# Altium PCB PCB1.PcbDoc
Units mil, origin at the board's own origin, x right, y up, seen from the top; angles counter-clockwise.
Board outline 1600 x 1365 mil, 2 copper layers (Top Layer, Bottom Layer); 12 components, 8 nets, 36 pads, 6 vias.
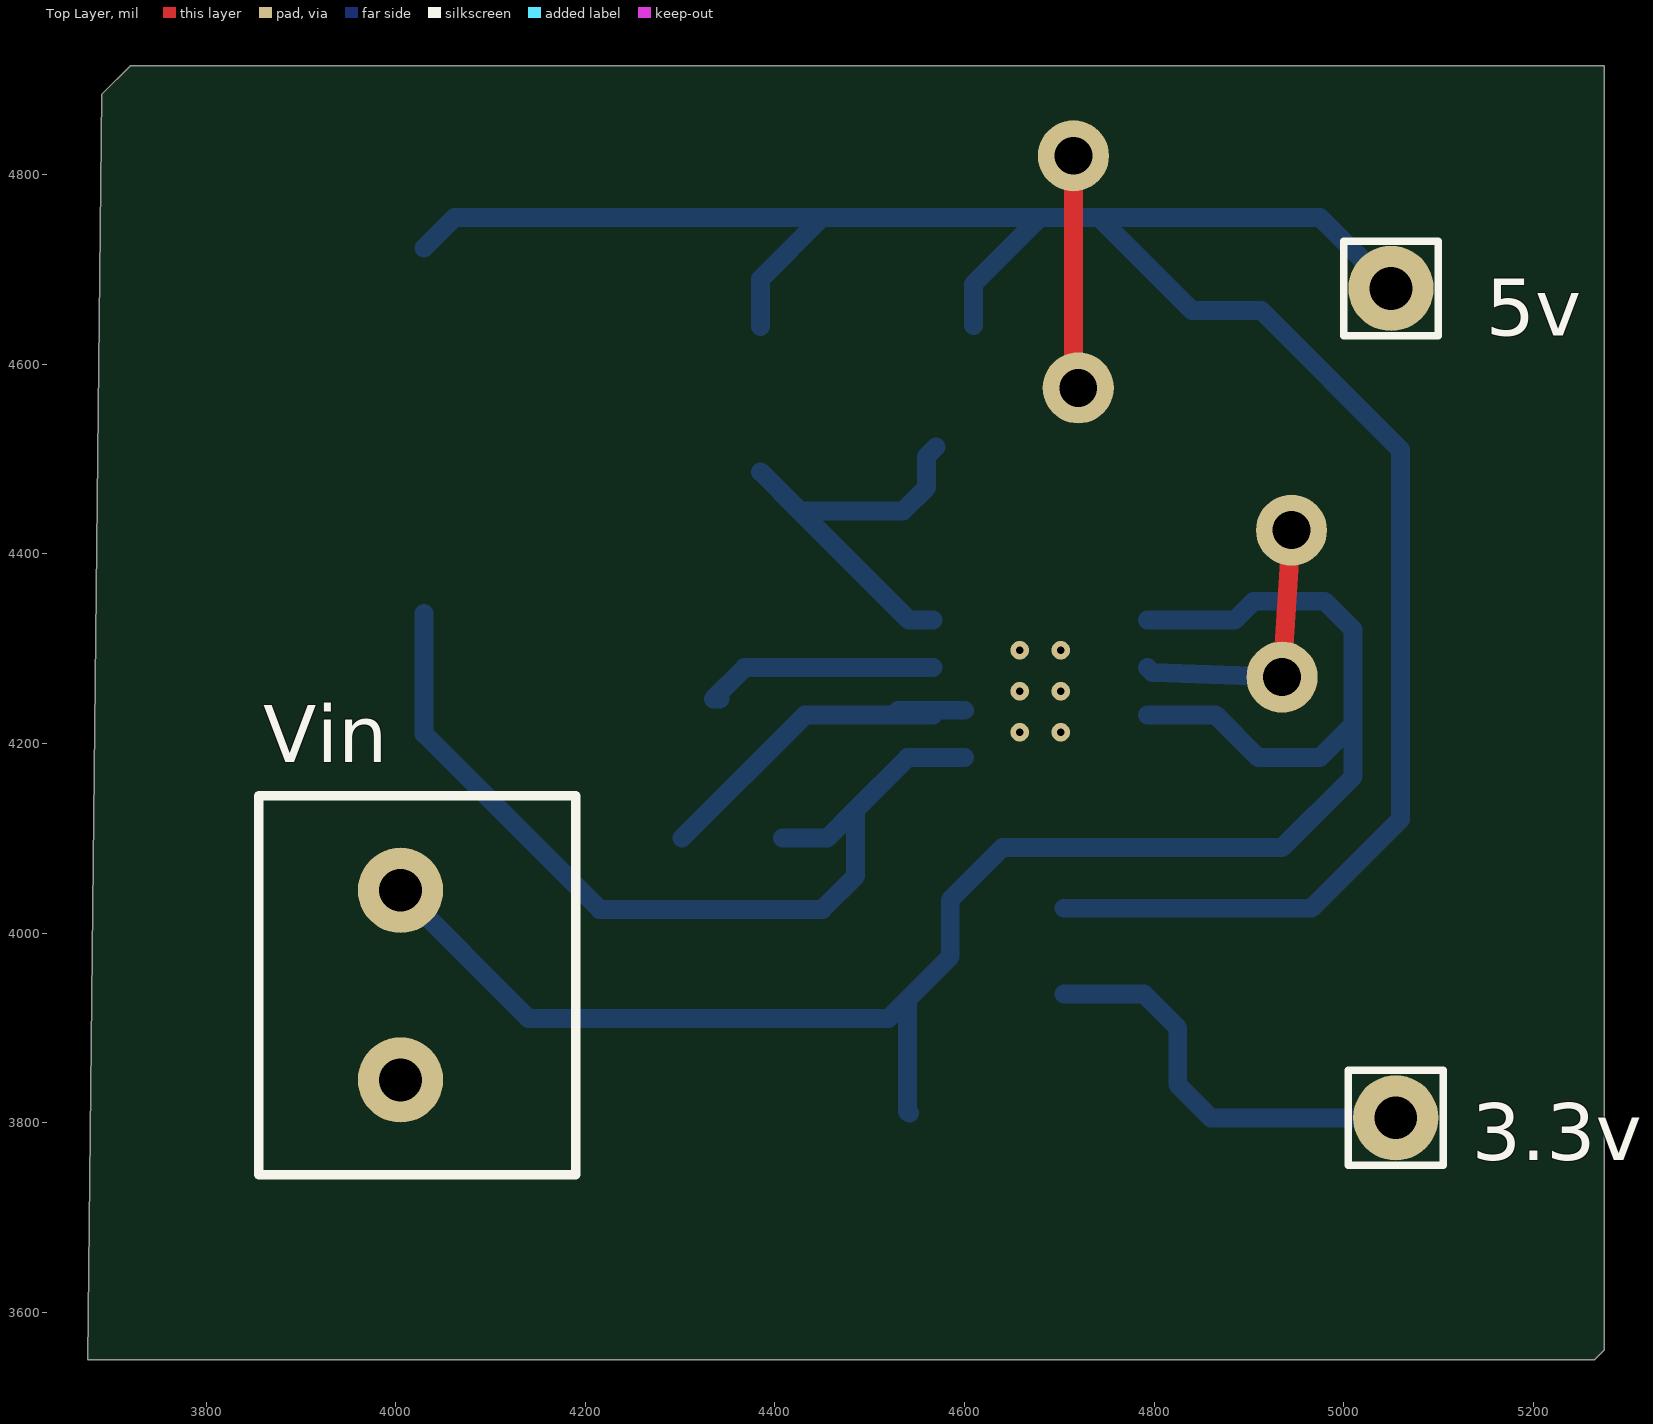
[diagram p0: Top Layer view]
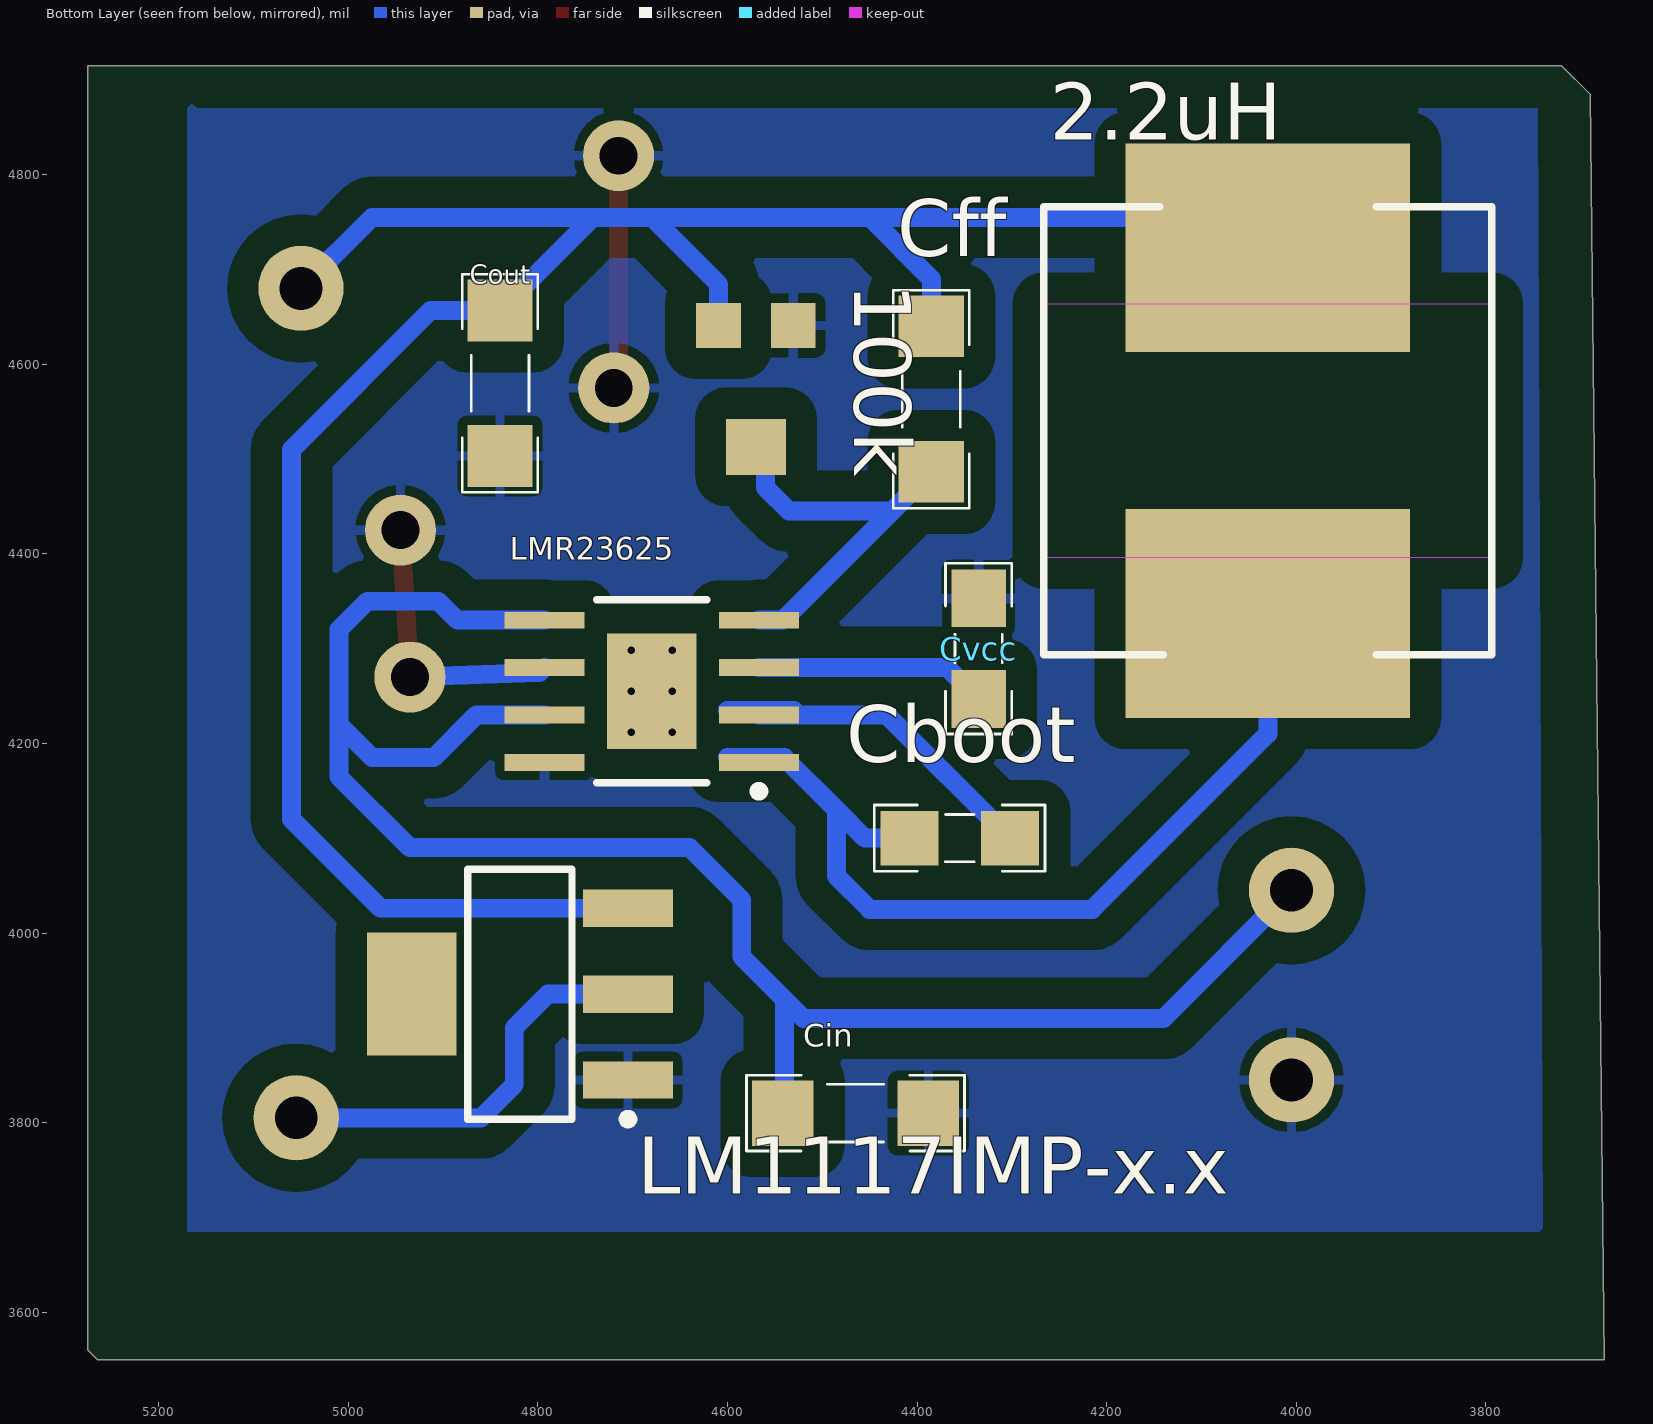
[diagram p1: Bottom Layer view, seen from below]
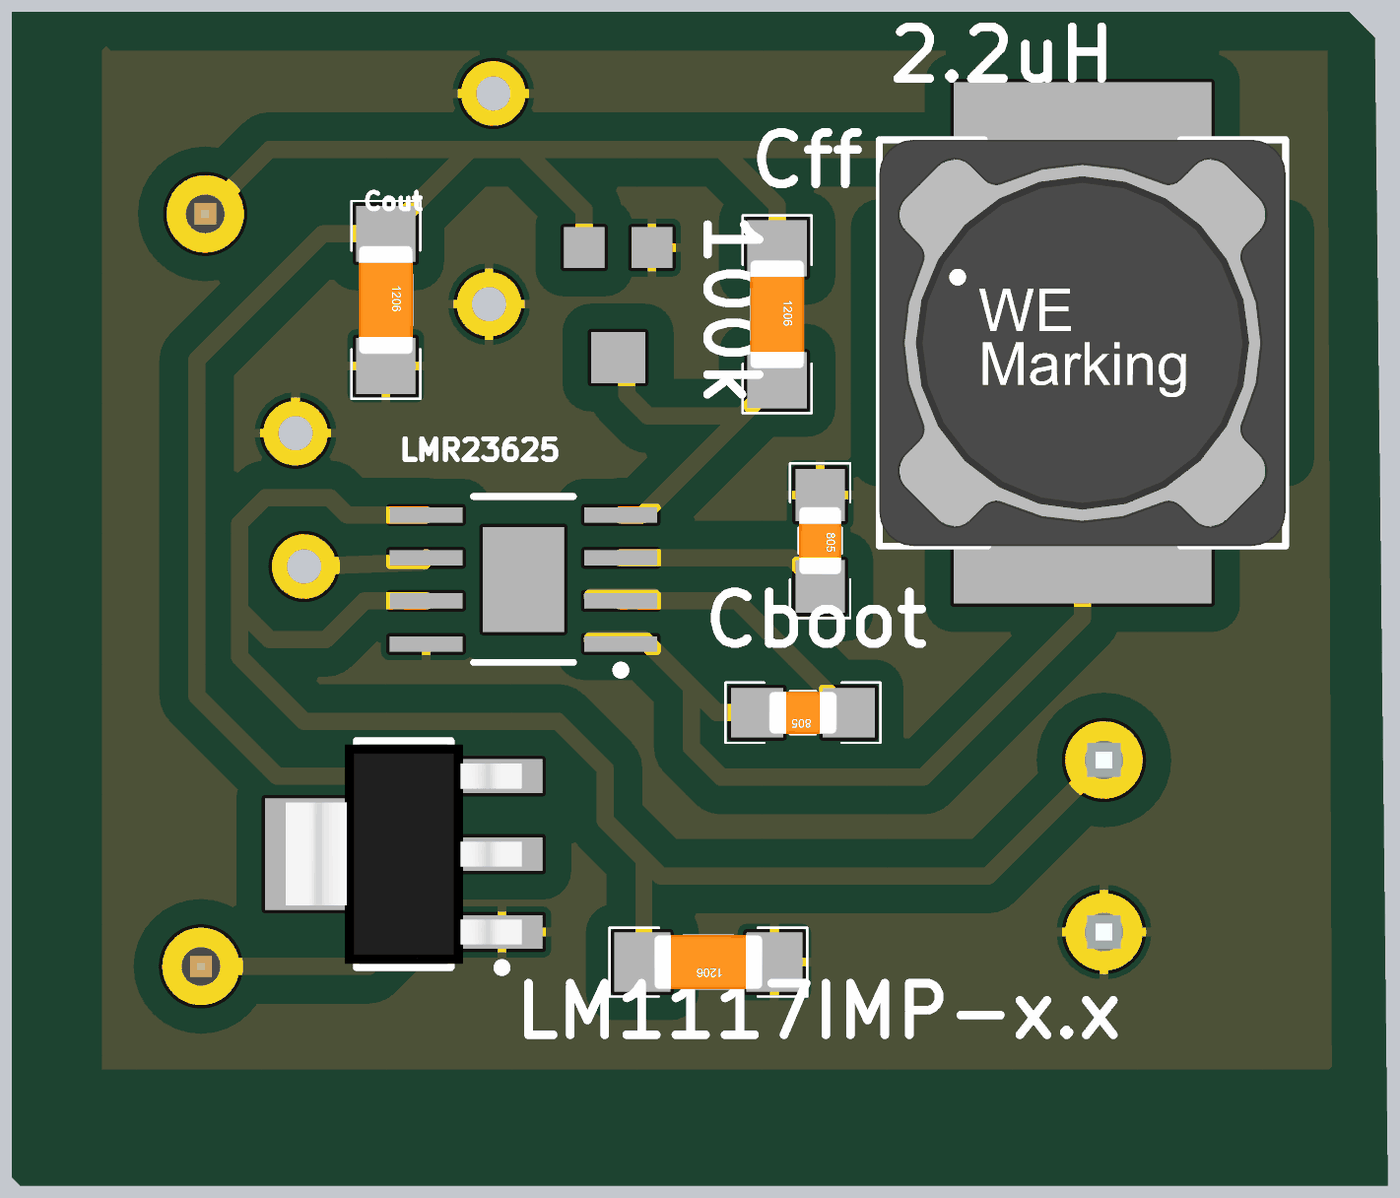
[diagram p2: 3D render of the assembled board from below, using the file's embedded part models]

## Layer stack, top to bottom
Top Solder: solder mask 0.4, Solder Resist, Dk 3.5
Top Layer: signal copper 1.4
Dielectric 1: dielectric 12.6, FR-4, Dk 4.8
Bottom Layer: signal copper 1.4
Bottom Solder: solder mask 0.4, Solder Resist, Dk 3.5

## Board outline
3690,4885 3720,4915 5275,4915 5275,3560 5265,3550 3675,3550

## Design rules (kind name [scope] priority, off if disabled: settings)
Clearance [All] p1: gap=33 ignorepadtopadclearanceinfootprint=FALSE except(0: Arc-Hole Track-Hole SMDPad-Hole THPad-Hole Via-Hole Fill-Hole Poly-Hole Region-Hole Text-Hole; 8: Arc-SMDPad Track-SMDPad SMDPad-SMDPad; 10: Arc-Arc Arc-Track Arc-THPad Arc-Via Arc-Text Track-Track Track-THPad Track-Via Track-Text SMDPad-THPad SMDPad-Via SMDPad-Text THPad-THPad THPad-Via THPad-Text Via-Via Via-Text Fill-Text Poly-Text Region-Text Text-Text)
PolygonConnect [All] p1: connectstyle=Relief reliefconductorwidth=10 reliefentries=4 polygonreliefangle="90 Angle" airgapwidth=10
RoutingVias [All] p1: holewidth=28 width=50 viastyle="Through Hole" minholewidth=28 minwidth=50 maxholewidth=28 maxwidth=50
SolderMaskExpansion [All] p1: expansion=4
Width [All] p1: maxlimit=24 minlimit=16 preferedwidth=20
30 further rules are at their usual default settings.

## Components (designator, comment, footprint, x,y, rotation, side; value= is the part's Value field where it differs from the comment)
2.2uH "1.0 μH" WE-PDA_1210 4030,4530 r180 bottom
3.3v "61300111121" 61300111121 5055,3805 r0 top
5v "61300111121" 61300111121 5050,4680 r0 top
100k "" TRIM_TC33X-2-104E 4570,4570 r270 bottom
Cboot "0.47uF" CAPC3413X12N 4355,4100 r0 bottom
Cff "18pF" CAPC4817X12N 4385,4563.23 r270 bottom
Cin "10uF" CAPC4817X12N 4465,3810 r0 bottom
Cout "33uF" CAPC4817X12N 4840,4580 r270 bottom
Cvcc "2.2uF" CAPC3413X12N 4335,4300 r270 bottom
LM1117IMP-x.x "LM1117IMP-x.x" SOT223_N 4819.17,3935.55 r0 bottom
LMR23625 "" LMR23625 4680,4255 r0 bottom
Vin "691311500002" 691311500002 4005,3945 r270 top

## Footprints (in the part's own frame and the unit in brackets; to place one, negate y for a bottom-side part, rotate by r counter-clockwise, add the part's x,y. Pads: shape width x height; smd on the part's side, far side on the other; paste and mask are expansions set on the pad)
61300111121 [mil] "1pins, 1 row, straight, gold plating"
  round 90 hole 45: 1(0,0)
  silkscreen extent -50,-50 50,50, body extent -50,-50 50,50, height 337
691311500002 [mil] "5,08mm - PCB Headers - Vertical - Opened ends -02p"
  round 90 hole 45: 1(-100,0) 2(100,0)
  silkscreen extent -200,-150 200,185, body extent -200,-150 200,185, height 473
CAPC3413X12N [mm] "Chip Capacitor, 2-Leads, Body 3/40x1/30mm, IPC Medium Density-Design:Abbas Basereh"
  rect 1.55x1.45 smd: 1(-1.35,0) 2(1.35,0)
  silkscreen extent -2.29,-0.89 2.29,0.89, body extent -1,-0.63 1,0.62, height 0.78
CAPC4817X12N [mm] "Chip Capacitor, 2-Leads, Body 4/80x1/70mm, IPC Medium Density-Design:Abbas Basereh"
  rect 1.65x1.75 smd: 1(-1.95,0) 2(1.95,0)
  silkscreen extent -2.92,-1.02 2.92,1.02, body extent -1.6,-0.8 1.6,0.8, height 1
LMR23625 [mm] "SOIC, 8-Leads, Body 4.90x3.90mm, Pitch 1.27mm, Thermal Pad 3.10x2.40mm, IPC Medium Density"
  rect 2.15x0.45 smd: 1(-2.875,1.905) 2(-2.875,0.635) 3(-2.875,-0.635) 4(-2.875,-1.905) 5(2.875,-1.905) 6(2.875,-0.635) 7(2.875,0.635) 8(2.875,1.905)
  rect 2.4x3.1 smd: 9(0,0)
  silkscreen extent -3,-2.45 1.47,2.8, body extent -2,-2.5 2,2.5, height 1.7
SOT223_N [mm] "SOT223, 4-Leads, Body 6.5x3.5mm, Pitch 2.3mm, Lead Span 7mm, IPC Medium Density"
  rect 2.4x1 smd: 1(-2.9,2.3) 2(-2.9,0) 3(-2.9,-2.3)
  rect 2.4x3.3 smd: 4(2.9,0)
  silkscreen extent -3.02,-3.35 1.4,3.47, body extent -3.49,-3.24 3.49,3.24, height 1.64
TRIM_TC33X-2-104E [mm]
  rect 1.2x1.2 smd: 1(-1.8,1) 3(-1.8,-1)
  rect 1.5x1.6 smd: 2(1.45,0)
WE-PDA_1210 [mil] "WE-PDA SMD Shielded Power Inductor, 1210"
  rect 300x220 smd: 1(0,192.91) 2(0,-192.91)
  Top Layer keep-out region: -236.22,133.86 236.22,133.86 236.22,-133.86 -236.22,-133.86
  silkscreen extent -236,-236 236,236, body extent -236,-236 236,236, height 382

## Part data
2.2uH: library part "WE-PDA 1210, 7847709010", "WE-PDA SMD Shielded Power InductorInductance = 1.0 µH", Inductance="1.0 µH", Manufacturer="Wurth Elektronik", partNo=7847709010, ComponentLink1Description=Manufacturer, ComponentLink1URL=http://www.we-online.de, ComponentLink2Description=Datasheet, ComponentLink2URL=http://katalog.we-online.de/pbs/datasheet/7847709010.pdf, Created by="Baojun Chen", Created Date=Nov.2015
3.3v 5v: "WR-PHD 2.54 mm THT Pin Header, 1p", Rated Current="3 A", Withstanding Voltage="500 VAC", Working Voltage="250 VAC", ComponentLink1Description=Manufacturer, ComponentLink1URL=http://www.we-online.de, ComponentLink2Description=Datasheet, ComponentLink2URL=http://katalog.we-online.de/em/datasheet/6130xx11121.pdf, Part Number=61300111121, Pin Number=1, Pitch="2.54 mm", Published Date="Aug 2017", Publisher="Wurth Elektronik"
100k: library part TC33X-2-104E, Package="SOD-23 Bourns", Availability=Unavailable, MF=Bourns, MP=TC33X-2-104E, Price=None
Cboot Cvcc: library part "CAP SMD 0805", "CAP 0805", Data=16-12-2016, Desc.="CAP SMD 0805", Designer="Abbas Basereh"
Cff Cin Cout: library part "CAP SMD 1206", "CAP 1206", Data=16-12-2016, Desc.="CAP SMD 1206", Designer="Abbas Basereh"
LM1117IMP-x.x: "x.x Volt, 800mA Low-Dropout Linear Regulator, 4-pin SOT-223", Manufacturer="National Semiconductor", PackageTopMarking=XYTT*N05B, PartNumber=LM1117IMP-3.3, PowerWise=N, Supplier Part Number 1=7614123, Code_IPC=SOT223-4, Code_JEDEC=TO-261-AA, ComponentLink1Description="LM1117 Datasheet", ComponentLink1URL=http://www.national.com/ds/LM/LM1117.pdf, ComponentLink2Description="LM1117 Web Page", ComponentLink2URL=http://www.national.com/pf/LM/LM1117.html, ComponentLink3Description="MP04A Package Page", ComponentLink3URL=http://www.national.com/packaging/folders/mp04a.html, CompType="LDO IC", DatasheetVersion=Apr-2006, PackageDescription="Molded SOT-223, 6.50 x 3.56 x 1.6mm Body, 4 Lead, 2.3mm Pitch", PackageReference=MP04A, PackageVersion="revB, Apr-2003", PinCount=4, Published=4-Dec-2008, Publisher="Altium Limited", RoHS=N, Supplier 1=Farnell
LMR23625: library part Component_1
Vin: "WR-TBL Serie 311 - 5.08 mm Open Vertical PCB Header, 02p", ComponentLink1Description=Manufacturer, ComponentLink1URL=http://www.we-online.de, ComponentLink2Description=Datasheet, ComponentLink2URL=http://katalog.we-online.de/em/datasheet/6913115000xx.pdf, Part Number=691311500002, Pin Number=02p, Pitch="5.08 mm", Published Date="Feb. 2017", Publisher="Wurth Elektronik"

## Free pads (board coordinates)
  round 75 hole 40: 2(4945,4425) 3(4935,4270) 4(4720,4575) 5(4715,4820)

## Via types
v1: diameter 19.68, hole 7.87, Top Layer to Bottom Layer, 6 vias

## Nets (pads, with @x,y where several pads share a name; then routed paths per layer and width w, separated by ;. In a path a pad name is that pad's centre, name@x,y a point inside that pad or via, vN(x,y) a via of type N, cw(c..) or ccw(c..) an arc to the next point about the centre after c; other vN are vias at no path point)
FB: 100k.2 Cff.2 LMR23625.4 | length 437.6
  Bottom Layer w20: Cff.2 4426.46,4445 ; LMR23625.4 4541.46,4330 4426.46,4445 ; 100k.2 4560,4502.91 4560,4470 4535,4445 4426.46,4445
GND: 100k.1 Cin.1 Cout.2 Cvcc.1 LM1117IMP-x.x.1 LMR23625.6 LMR23625.8 pad.2 pad.3 pad.4 pad.5 Vin.2 | length 546.4
  Top Layer w20: pad.5 4715,4580 pad.4 ; pad.3 pad.2
  Bottom Layer w20: LMR23625.6 4798.19,4275 pad.3
Net2.2uH_2: 2.2uH.2 Cboot.2 LMR23625.1 | length 970.3
  Bottom Layer w20: 2.2uH.2 4030,4210 4215,4025 4450,4025 4485,4060 4485,4130 ; Cboot.2 4455,4100 4485,4130 ; LMR23625.1@4600,4185 4540,4185 4485,4130
Net3.3v_1: 3.3v.1 LM1117IMP-x.x.2 | length 439.2
  Bottom Layer w20: LM1117IMP-x.x.2 4789.45,3935.55 4825,3900 4825,3840 4860,3805 3.3v.1
NetCboot_1: Cboot.1 LMR23625.2 | length 388.8
  Bottom Layer w20: Cboot.1 4431.85,4230 LMR23625.2 ; LMR23625.2@4530,4235 LMR23625.2@4600,4235
NetCin_2: Cin.2 LMR23625.5 LMR23625.7 Vin.1 | length 1964.9
  Bottom Layer w20: Vin.1 4140,3910 4520,3910 4540,3930 ; Cin.2 4540,3811.77 4540,3930 ; LMR23625.7 4865,4230 4910,4185 4975,4185 5010,4220 ; LMR23625.5 4885,4330 4905,4350 4980,4350 5010,4320 5010,4220 ; 4540,3930 4585,3975 4585,4035 4640,4090 4935,4090 5010,4165 5010,4220
NetCvcc_2: Cvcc.2 LMR23625.3 | length 252.4
  Bottom Layer w20: Cvcc.2@4341.85,4246.85 Cvcc.2 4368.15,4280 LMR23625.3
Vout: 2.2uH.1 5v.1 100k.3 Cff.1 Cout.1 LM1117IMP-x.x.3 | length 2553.3
  Bottom Layer w20: 2.2uH.1 4062.09,4755 4450,4755 ; Cff.1 4385,4690 4450,4755 ; 100k.3 4609.37,4684.37 4680,4755 ; LM1117IMP-x.x.3 4966.1,4026.1 5060,4120 5060,4510 4913.23,4656.77 Cout.1 4741.77,4755 ; 5v.1 4975,4755 4741.77,4755 ; 4450,4755 4680,4755 ; 4680,4755 4741.77,4755
pads on no net: LM1117IMP-x.x.4 LMR23625.9
copper on no net:
  other v1: 4658.35,4211.69 4701.65,4211.69 4658.35,4255 4701.65,4255 4658.35,4298.31 4701.65,4298.31

## Polygon pours and split planes (outlines as drawn)
GND on Bottom Layer "Bottom Layer-No Net" (solid, pour order 40): 3745,4870 5160,4870 5165,4875 5170,4870 5170,3685 3740,3685